# Altium PCB PCB_1.PcbDoc
Units mil, origin at the board's own origin, x right, y up, seen from the top; angles counter-clockwise.
Board outline 6655 x 4265 mil, 2 copper layers (Top Layer, Bottom Layer); 57 components, 68 nets, 281 pads, 9 vias.
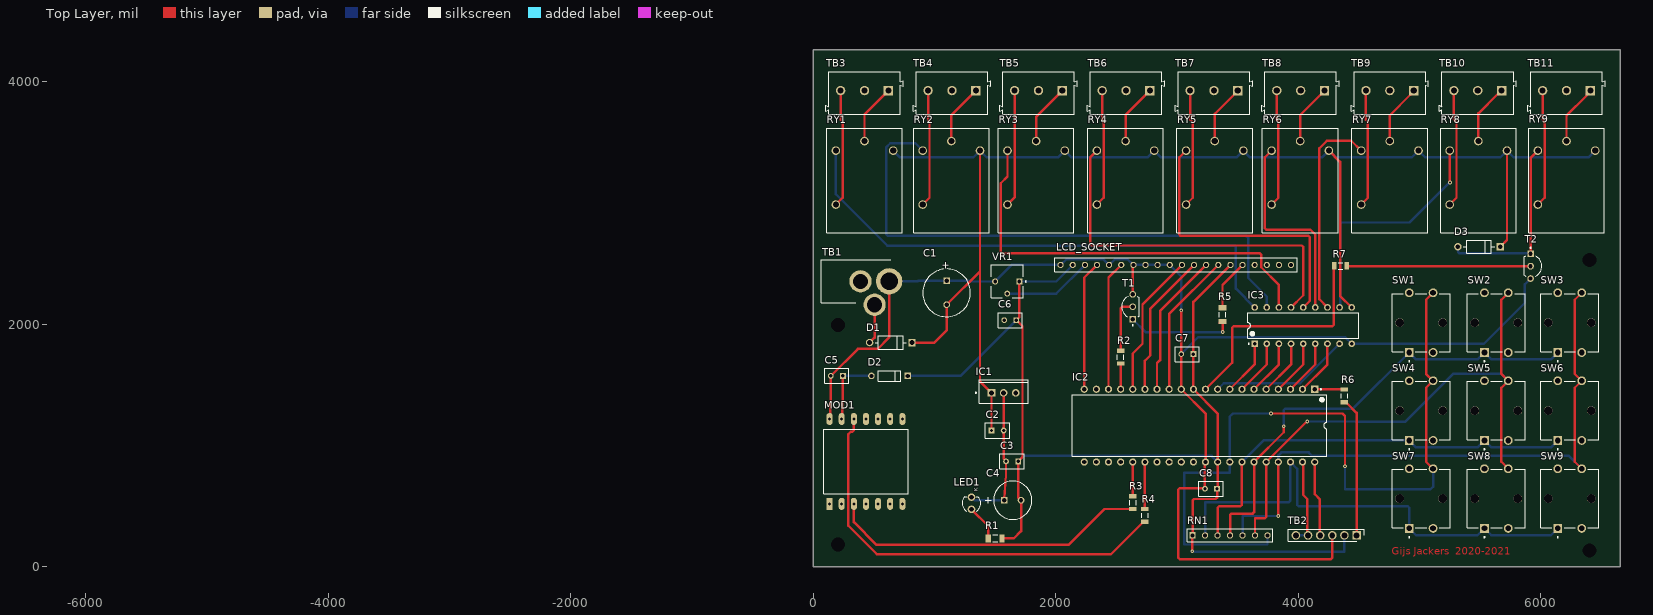
[diagram p0: Top Layer view]
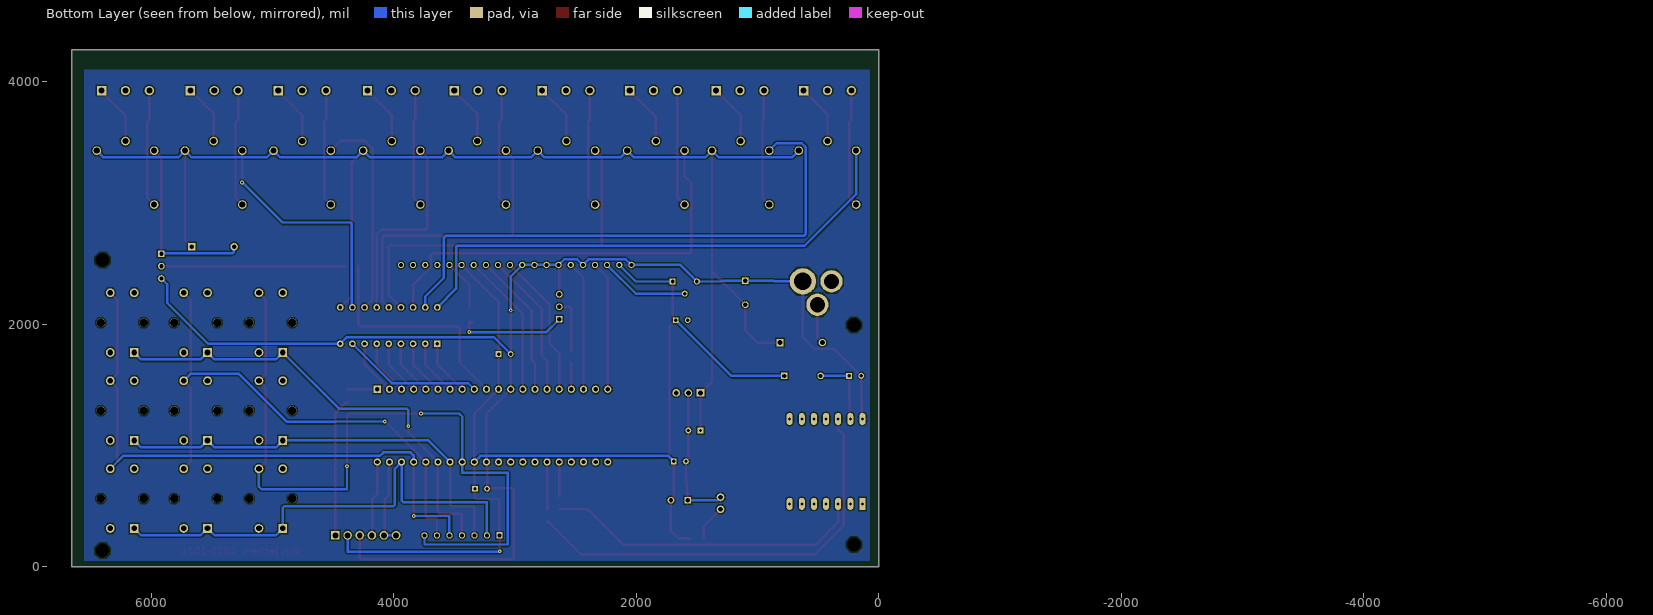
[diagram p1: Bottom Layer view, seen from below]
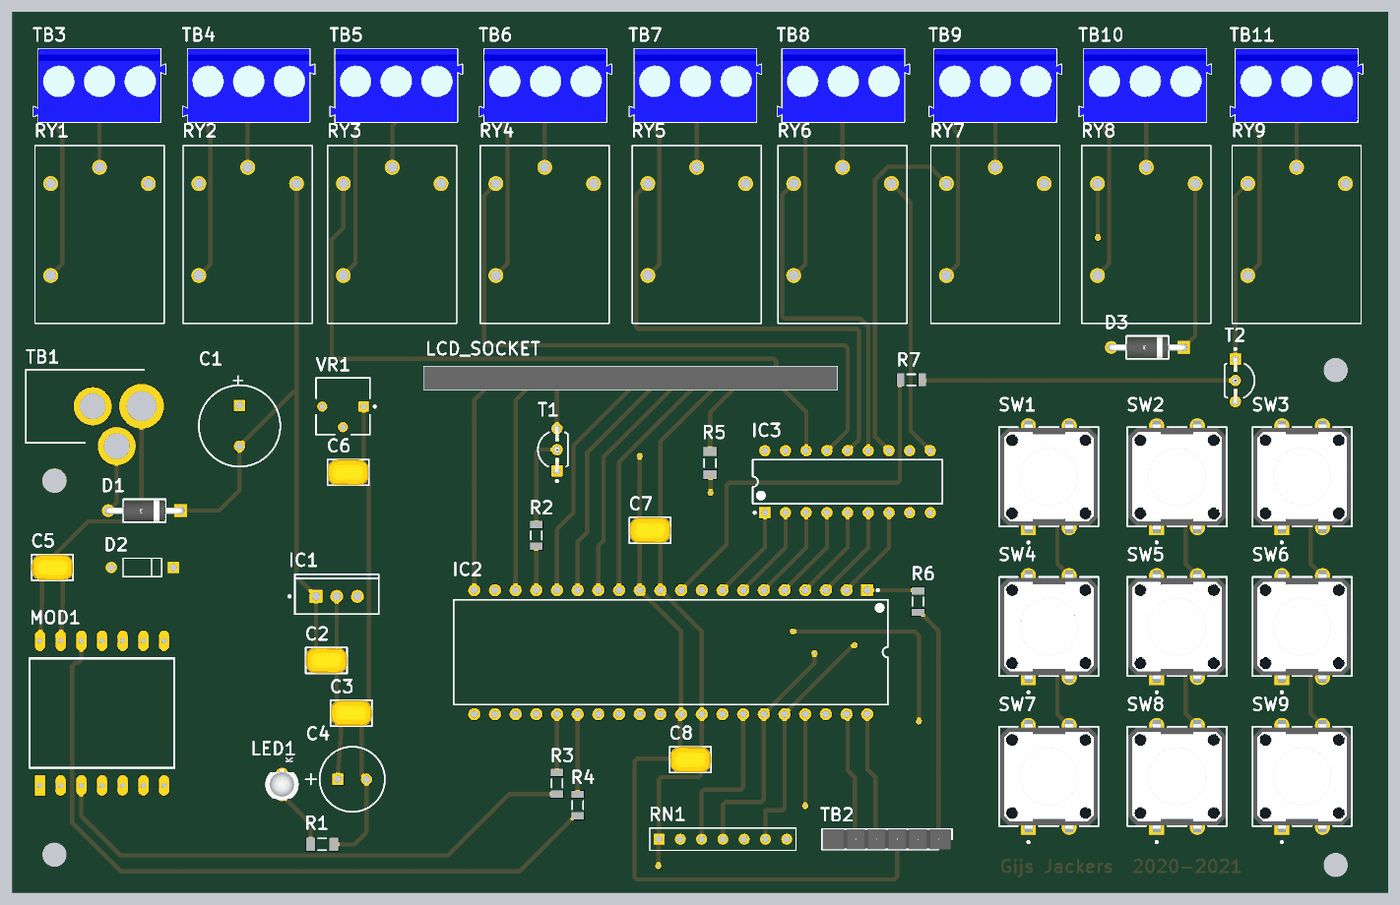
[diagram p2: 3D render of the assembled board from above, using the file's embedded part models]

## Layer stack, top to bottom
Top Solder: solder mask 0.4, Solder Resist, Dk 3.5
Top Layer: signal copper 1.4
Dielectric 1: dielectric 12.6, FR-4, Dk 4.8
Bottom Layer: signal copper 1.4
Bottom Solder: solder mask 0.4, Solder Resist, Dk 3.5

## Board outline
0,4265 6655,4265 6655,0 0,0

## Design rules (kind name [scope] priority, off if disabled: settings)
Clearance [All] p1: gap=10 ignorepadtopadclearanceinfootprint=FALSE except(0: Arc-Hole Track-Hole SMDPad-Hole THPad-Hole Via-Hole Fill-Hole Poly-Hole Region-Hole Text-Hole)
PolygonConnect [All] p1: connectstyle=Relief reliefconductorwidth=10 reliefentries=4 polygonreliefangle="90 Angle" airgapwidth=10
RoutingVias [All] p1: holewidth=15 width=30 viastyle="Through Hole" minholewidth=15 minwidth=30 maxholewidth=15 maxwidth=30
SolderMaskExpansion [All] p1: expansion=4 istentingtop=FALSE
Width [All] p1: maxlimit=20 minlimit=20 preferedwidth=20 minimp=50.000000 maximp=50.000000 favimp=50.000000
30 further rules are at their usual default settings.

## Components (designator, comment, footprint, x,y, rotation, side; value= is the part's Value field where it differs from the comment)
C1 "ECA-1HM221" CAPPR65-500-1250X1000X1350 1100,2260 r270 top
C2 "SR205C104KAR" FP-SR20-MFG 1520,1125 r0 top value=100nF
C3 "SR205C104KAR" FP-SR20-MFG 1640,870 r180 top value=100nF
C4 "ECA1HM101" CAPPR65-350-1150X800X1250 1645,550 r0 top
C5 "SR205C104KAR" FP-SR20-MFG 195,1575 r180 top value=100nF
C6 "SR205C104KAR" FP-SR20-MFG 1625,2035 r180 top value=100nF
C7 "SR205C104KAR" FP-SR20-MFG 3085,1755 r180 top value=100nF
C8 "SR205C104KAR" FP-SR20-MFG 3280,645 r180 top value=100nF
D1 "1N4007" FP-1N4007-MFG 640,1850 r180 top value=15pF
D2 "BAT43" DO-35_STM 780,1575 r180 top
D3 "1N4007" FP-1N4007-MFG 5490,2640 r180 top value=15pF
IC1 "MC7805CTG" ONSC-TO-220-3-221AB-01 1570,1435 r90 top
IC2 "PIC18F45K22-E/P" MCHP-PDIP-P40 3185,1165 r270 top
IC3 "ULN2803A" STM-DIP-18 4040,1990 r90 top
LCD_SOCKET "D01-9972042" D019972042 2040,2490 r0 top
LED1 "151031SS04000" "Type 3mm" 1305,525 r90 top
MOD1 "ESQ-107-12-G-D" DIP14 135,520 r90 top
R1 "ERJ-8GEYJ331V" RESC3216X70X50NL05T20 1500,235 r0 top
R2 "ERJ-8GEYJ472V" RESC3216X70X50LL05T20 2535,1730 r270 top
R3 "ERJ-8GEYJ102V" RESC3216X70X50LL05T20 2635,530 r90 top
R4 "ERJ-8GEYJ102V" RESC3216X70X50LL05T20 2735,425 r90 top
R5 "ERJ-8GEYJ4R7V" RESC3216X70X50NL05T20 3375,2080 r90 top
R6 "ERJ-8GEYJ100V" RESC3216X70X50LL05T20 4380,1410 r270 top
R7 "ERJ-8GEYJ472V" RESC3216X70X50LL05T20 4347.83,2482.83 r0 top
RN1 "4607X-101-103LF" BO_4607X 3128,260 r0 top
RY1 "G5LE-1A-CF DC12" "RELAY_G5LE-1A DC5_OMR" 423.11,2861.77 r0 top
RY2 "G5LE-1A-CF DC12" "RELAY_G5LE-1A DC5_OMR" 1139.33,2861.77 r0 top
RY3 "G5LE-1A-CF DC12" "RELAY_G5LE-1A DC5_OMR" 1838.11,2861.77 r0 top
RY4 "G5LE-1A-CF DC12" "RELAY_G5LE-1A DC5_OMR" 2575.55,2861.77 r0 top
RY5 "G5LE-1A-CF DC12" "RELAY_G5LE-1A DC5_OMR" 3310.55,2861.77 r0 top
RY6 "G5LE-1A-CF DC12" "RELAY_G5LE-1A DC5_OMR" 4015.55,2861.77 r0 top
RY7 "G5LE-1A-CF DC12" "RELAY_G5LE-1A DC5_OMR" 4754.33,2861.77 r0 top
RY8 "G5LE-1A-CF DC12" "RELAY_G5LE-1A DC5_OMR" 5484.33,2861.77 r0 top
RY9 "G5LE-1A-CF DC12" "RELAY_G5LE-1A DC5_OMR" 6211.17,2861.77 r0 top
SW1 "B3F-4000" FP-B3F-4000-MFG 5012.76,2013.94 r90 top
SW2 "B3F-4000" FP-B3F-4000-MFG 5632.76,2013.94 r90 top
SW3 "B3F-4000" FP-B3F-4000-MFG 6237.83,2013.94 r90 top
SW4 "B3F-4000" FP-B3F-4000-MFG 5012.76,1288.94 r90 top
SW5 "B3F-4000" FP-B3F-4000-MFG 5632.76,1288.94 r90 top
SW6 "B3F-4000" FP-B3F-4000-MFG 6237.83,1288.94 r90 top
SW7 "B3F-4000" FP-B3F-4000-MFG 5012.76,563.94 r90 top
SW8 "B3F-4000" FP-B3F-4000-MFG 5632.76,563.94 r90 top
SW9 "B3F-4000" FP-B3F-4000-MFG 6237.83,563.94 r90 top
T1 "BC337-25ZL1G" ONSC-TO-92-3-29-11_AM_BL 2635,2145 r90 top
T2 "BC337-25ZL1G" ONSC-TO-92-3-29-11_AM_BL 5915,2480 r270 top
TB1 "Component_1" MJ-180PH 638.03,2355 r180 top
TB2 "M20-7820646" HDRV6W70P0X254_1X6_1564X250X865P 4480,260 r180 top
TB3 "691101710003" 691101710003 423.11,3907.64 r180 top
TB4 "691101710003" 691101710003 1144.33,3907.64 r180 top
TB5 "691101710003" 691101710003 1857.47,3907.64 r180 top
TB6 "691101710003" 691101710003 2579.33,3907.64 r180 top
TB7 "691101710003" 691101710003 3304.32,3907.64 r180 top
TB8 "691101710003" 691101710003 4019.33,3907.64 r180 top
TB9 "691101710003" 691101710003 4754.32,3907.64 r180 top
TB10 "691101710003" 691101710003 5479.32,3907.64 r180 top
TB11 "691101710003" 691101710003 6211.17,3907.64 r180 top
VR1 "3362P-1-103LF" BOUR-3362P 1600,2355 r180 top

## Footprints (in the part's own frame and the unit in brackets; to place one, negate y for a bottom-side part, rotate by r counter-clockwise, add the part's x,y. Pads: shape width x height; smd on the part's side, far side on the other; paste and mask are expansions set on the pad)
691101710003 [mm] "5,00mm - modular - blue - Horizontal entry with pressure clamp - 12,6mm height - 03p"
  rect 1.95x1.95 hole 1.3: 1(-5,-0.5)
  round 1.95 hole 1.3: 2(0,-0.5) 3(5,-0.5)
  silkscreen extent -8.1,-4.5 8.1,4.5, body extent -8.1,-4.5 8.1,4.5, height 12.65
BO_4607X [mil]
  rect 52x52 hole 32 mask+0: 1(0,0)
  round 52 hole 32 mask+0: 2(103,0) 3(206,0) 4(309,0) 5(412,0) 6(515,0) 7(618,0)
  silkscreen extent -45,-54 663,54, body extent 0,0 10,10, height 10
BOUR-3362P [mm] "THD, 3-Leads, Body 6.6x6.99mm, Pitch 2.54mm"
  rect 1.25x1.25 hole 0.75: 1(-2.54,0.035)
  round 1.25 hole 0.75: 2(0,2.575) 3(2.54,0.035)
  silkscreen extent -4.03,-3.49 3.3,3.49, body extent -3.3,-3.49 3.3,3.49, height 4.95
CAPPR65-350-1150X800X1250 [mm] "THD, 2-Leads, Dia 8mm, Body 11.5mm"
  rect 1.4x1.4 hole 0.9: 1(-1.75,0)
  round 1.4 hole 0.9: 2(1.75,0)
  silkscreen extent -5.71,-4 4,4, body extent -4,-4 4,4, height 12.5
CAPPR65-500-1250X1000X1350 [mm] "THD, 2-Leads, Dia 10mm, Body Length 12.5mm"
  rect 1.4x1.4 hole 0.9: 1(-2.5,0)
  round 1.4 hole 0.9: 2(2.5,0)
  silkscreen extent -5,-5 5,5, body extent -5,-5 5,5, height 13.5
D019972042 [mm]
  round 1.3 hole 0.8: 1(0,0) 2(2.54,0) 3(5.08,0) 4(7.62,0) 5(10.16,0) 6(12.7,0) 7(15.24,0) 8(17.78,0) 9(20.32,0) 10(22.86,0) 11(25.4,0) 12(27.94,0) 13(30.48,0) 14(33.02,0) 15(35.56,0) 16(38.1,0) 17(40.64,0) 18(43.18,0) 19(45.72,0) 20(48.26,0)
  silkscreen extent -1.27,-1.4 49.53,1.5, body extent -1.27,-1.4 49.53,1.4, height 4.35
DIP14 [mil]
  rect 100x50 hole 25: 1(0,0)
  oval 100x50 hole 25: 2(0,-100) 3(0,-200) 4(0,-300) 5(0,-400) 6(0,-500) 7(0,-600) 8(700,-600) 9(700,-500) 10(700,-400) 11(700,-300) 12(700,-200) 13(700,-100) 14(700,0)
  silkscreen extent 85,-650 615,50
DO-35_STM [mil]
  rect 54x54 hole 34 mask+0: 1(0,0)
  round 54 hole 34 mask+0: 2(300,0)
  silkscreen extent 56,-44 244,45, body extent 0,0 10,10, height 10
FP-1N4007-MFG [mm]
  rect 1.55x1.55 hole 1 paste-1000 mask+0: 1(-4.44,0)
  round 1.55 hole 1 paste-1000 mask+0: 2(4.44,0)
  silkscreen extent -3.27,-1.4 3.27,1.4, body extent -5.32,-1.5 5.32,1.5, height 0.25
FP-B3F-4000-MFG [mm]
  rect 1.85x1.85 hole 1.2 paste-1000 mask+0: 1(-6.25,2.5)
  round 1.85 hole 1.2 paste-1000 mask+0: 2(6.25,2.5) 3(-6.25,-2.5) 4(6.25,-2.5)
  round 1.8 hole 1.8 unplated paste-1000 mask+0: ""(0,4.5) ""(0,-4.5)
  silkscreen extent -8.2,-6.1 6.1,6.1, body extent -7.27,-6.2 7.27,6.2, height 0.25
FP-SR20-MFG [mm]
  rect 1.2x1.2 hole 0.7 paste-1000 mask+0: 1(-1.27,0)
  round 1.2 hole 0.7 paste-1000 mask+0: 2(1.27,0)
  silkscreen extent -2.54,-1.59 2.54,1.59, body extent -2.64,-1.69 2.64,1.69, height 0.25
HDRV6W70P0X254_1X6_1564X250X865P [mm]
  rect 1.8x1.8 hole 1.2: 1(0,0)
  round 1.8 hole 1.2: 2(2.54,0) 3(5.08,0) 4(7.62,0) 5(10.16,0) 6(12.7,0)
  silkscreen extent -1.65,-1.25 14.35,1.25, body extent -1.47,-1.25 14.17,1.25, height 8.65
MCHP-PDIP-P40 [mm] "PDIP, 40-Leads, Body 51.75x13.53mm, Pitch 2.54mm"
  rect 1.5x1.5 hole 0.9: 1(-7.62,24.13)
  round 1.5 hole 0.9: 2(-7.62,21.59) 3(-7.62,19.05) 4(-7.62,16.51) 5(-7.62,13.97) 6(-7.62,11.43) 7(-7.62,8.89) 8(-7.62,6.35) 9(-7.62,3.81) 10(-7.62,1.27) 11(-7.62,-1.27) 12(-7.62,-3.81) 13(-7.62,-6.35) 14(-7.62,-8.89) 15(-7.62,-11.43) 16(-7.62,-13.97) 17(-7.62,-16.51) 18(-7.62,-19.05) 19(-7.62,-21.59) 20(-7.62,-24.13) 21(7.62,-24.13) 22(7.62,-21.59) 23(7.62,-19.05) 24(7.62,-16.51) 25(7.62,-13.97) 26(7.62,-11.43) 27(7.62,-8.89) 28(7.62,-6.35) 29(7.62,-3.81) 30(7.62,-1.27) 31(7.62,1.27) 32(7.62,3.81) 33(7.62,6.35) 34(7.62,8.89) 35(7.62,11.43) 36(7.62,13.97) 37(7.62,16.51) 38(7.62,19.05) 39(7.62,21.59) 40(7.62,24.13)
  silkscreen extent -7.74,-26.65 6.45,26.65, body extent -7.76,-26.6 7.76,26.6, height 6.35
MJ-180PH [mm]
  round 5.5 hole 3.65: 1(0.3,0)
  round 4.67 hole 3.16: 2(6.3,0) 3(3.35,4.9)
  silkscreen extent 0,-4.5 14.5,4.5
ONSC-TO-92-3-29-11_AM_BL [mm] "TO, 3-Leads, Body Dia 4.7mm, Pitch 2.6mm"
  rect 1.4x1.4 hole 0.9: 1(-2.6,0)
  round 1.4 hole 0.9: 2(0,0) 3(2.6,0)
  silkscreen extent -3.97,-1.34 2.13,2.35, body extent -2.84,-1.34 2.84,2.35, height 5.33
ONSC-TO-220-3-221AB-01 [mm] "FM, 3-Leads, Body 10.3x4.85mm, Pitch 2.54mm"
  rect 1.6x1.6 hole 1: 1(0,2.54)
  round 1.6 hole 1: 2(0,0) 3(0,-2.54)
  silkscreen extent -2.19,-5.15 2.72,5.92, body extent -2.16,-5.15 2.69,5.15, height 19.68
"RELAY_G5LE-1A DC5_OMR" [mm]
  round 1.808 hole 1.3 mask+0: 1(0,16.5) 2(-6,14.5) 3(-6,3.2) 5(6,14.5)
  silkscreen extent -7.93,-2.68 7.93,19.18
RESC3216X70X50LL05T20 [mm] "Chip Resistor, 2-Leads, Body 3.20x1.60mm, IPC High Density"
  rect 0.9x1.55 smd: 1(-1.325,0) 2(1.325,0)
  silkscreen extent -0.5,-0.67 0.5,0.67, body extent -1.63,-0.82 1.62,0.82, height 0.7
RESC3216X70X50NL05T20 [mm] "Chip Resistor, 2-Leads, Body 3.20x1.60mm, IPC Medium Density"
  rect 1.1x1.65 smd: 1(-1.425,0) 2(1.425,0)
  silkscreen extent -0.5,-0.73 0.5,0.73, body extent -1.63,-0.82 1.62,0.82, height 0.7
STM-DIP-18 [mm] "DIP, 18-Leads, Body 23.25x7.1mm, Pitch 2.54mm"
  rect 1.4x1.4 hole 0.8: 1(-3.81,10.16)
  round 1.4 hole 0.8: 2(-3.81,7.62) 3(-3.81,5.08) 4(-3.81,2.54) 5(-3.81,0) 6(-3.81,-2.54) 7(-3.81,-5.08) 8(-3.81,-7.62) 9(-3.81,-10.16) 10(3.81,-10.16) 11(3.81,-7.62) 12(3.81,-5.08) 13(3.81,-2.54) 14(3.81,0) 15(3.81,2.54) 16(3.81,5.08) 17(3.81,7.62) 18(3.81,10.16)
  silkscreen extent -3.93,-11.65 2.7,11.65, body extent -3.93,-11.63 3.93,11.63, height 3.93
"Type 3mm" [mm] "THT, LED-3mm, 2pin- Body 4.15mm(max)"
  round 1.6 hole 1: 1(1.27,0) 2(-1.27,0)
  silkscreen extent -1.66,-1.95 1.4,1.95, body extent -1.93,-1.94 1.87,1.94, height 10.5

## Part data
C1: library part CMP-1665-00043-1, "Aluminum Electrolytic Capacitor, 220 uF, +/- 20%, 50 V, -40 to 85 degC, 2-Pin THD, RoHS, Bulk", Case\Package=SOIC, Max Operating Temperature="70 degC", Max Supply Voltage="5.5 V", Min Operating Temperature="0 degC", Min Supply Voltage="4.5 V", Nominal Supply Current="10 mA", Nominal Supply Voltage="5 V", Package Quantity=50, Channels=2, ComponentLink1Description="Manufacturer URL", ComponentLink1URL=http://www.panasonic.com/, ComponentLink2Description=Datasheet, ComponentLink2URL=http://industrial.panasonic.com/cdbs/www-data/pdf/RDF0000/DMF0000COL68.pdf, Data Rate="120 kbps", DatasheetVersion=Mar-16, Height="1.5 mm", Interface=RS-232, Length="10 mm", Mount="Surface Mount", PackageDescription="2-Pin Radial Lead, Dia 10 mm, Body Length 12.5 mm", PackageReference=CAPPR65-500-1250X1000X1350, Packaging=Rail/Tube, Pins=16, Propagation Delay="10 us", Radiation Hardening=No, REACH SVHC="No SVHC", RoHSCompliant=true, Width="4 mm"
C2 C3 C5 C6 C7 C8: library part CMP-04427-000013-1, "CAP CER 0.1UF 50V X7R RADIAL", Capacitance=100nF, Manufacturer=AVX, Package=SR20, Temperature="-55°C to +125°C", Temperature Characteristic=X7R, Temperature Range High=+125°C, Temperature Range Low=-55°C, Tolerance=10%, Voltage=50V, Automotive=No, Category=Cap, ComponentLink2Description=Datasheet, ComponentLink2URL=http://datasheets.avx.com/SR-Series.pdf, Device Class L1="Passive Components", Device Class L2=Capacitors, Device Class L3="Ceramic Capacitors", Digikey Description="CAP CER 0.1UF 50V X7R RADIAL", Height=5.08mm, Lead Free=Yes, Manufacturer Part Number=SR205C104KAR, Material=Ceramic, Mouser Description="Multilayer Ceramic Capacitors MLCC - Leaded 50volts 0.1uF 10% X7R", Octopart=https://octopart.com/sr205c104kar-avx-145048, RoHS=TRUE, Voltage Rating=50V
C4: library part CMP-1665-00042-2, "Aluminum Electrolytic Capacitor, 100 uF, +/- 20%, 50 V, -40 to 85 degC, 2-Pin THD, RoHS, Bulk", Capacitance=100uF, Case/Package=Radial, Dielectric Material=Aluminium, Leakage Current=3uA, Manufacturer=Panasonic, Max Operating Temperature=85degC, Min Operating Temperature=-40degC, Package Description="2-Pin Radial Lead, Dia 8 mm, Height 12.5 mm", Package Quantity=200, Package Reference=CAPPR65-350-1150X800X1250, Ripple Current=250mA, Tolerance=20%, Voltage=50V, Datasheet URL=https://industrial.panasonic.com/cdbs/www-data/pdf/RDF0000/ABA0000C1218.pdf, Datasheet Version="Rev. 05, 10/2016", Diameter=8mm, Dissipation Factor=0.12%, Height=11.5mm, Height - Seated (Max)=0.492inch, Lead Diameter=0.6mm, Lead Free=LeadFree, Lead Pitch=3.5mm, Lead/Base Style=Straight, Length=11.5mm, Life (Hours)=2000Hour, Manufacturer URL=http://www.panasonic.com/, Mount=ThroughHole, Number of Pins=2, Packaging=Bulk, Polarity=Polar, Radiation Hardening=No, REACH SVHC=NoSVHC, Ripple Current (AC)=250mA, RoHSCompliant=true, Termination=Radial, Voltage Rating=50V, Voltage Rating (DC)=50V
D1 D3: library part CMP-123542-000001-1, "Rectifier diode 1000 V 1 A DO-41, ,", Capacitance=15pF, Forward Current=1A, Manufacturer=Diotec, Max Junction Temp=+175°C, Max Repetitive Reverse Voltage=1000V, Max Surge Forward Current=27A, Peak Reverse Current=5uA, Temperature="-50°C to +175°C", Temperature Range Low=-50°C, Automotive=No, Category=Diode, ComponentLink2Description=Datasheet, ComponentLink2URL=https://datasheet.octopart.com/1N4007-Diotec-datasheet-62346875.pdf, Device Class L1="Discrete Semiconductors", Device Class L2=Diodes, Device Class L3="Rectifier Diodes", Height=2.8mm, Ipc Land Pattern Name=DIOAD888W100L520D280, Lead Free=Yes, Manufacturer Part Number=1N4007, Octopart=https://octopart.com/1n4007-diotec-4040411, Package=1N4007, Reverse Voltage=1000V, RoHS=TRUE, Temperature Range High=+175°C
D2 RN1 RY1 RY2 RY3 RY4 RY5 RY6 RY7 RY8 RY9: "No Description Available", Copyright="Copyright (C) 2018 Accelerated Designs. All rights reserved", RefDes=RefDes, Type=DEV
  D2: Built_By=EMA_UL_Team, Manufacturer_Part_Number=BAT43, SourceLibrary=Add_to_database_2021-01-20, Vendor=STMicroelectronics
  RN1: Built_By=EMA_UL_Team, Manufacturer_Part_Number=4607X-101-103LF, SourceLibrary=BadPin1FPs_Fixed, Vendor="Bourns Electronics"
  RY1 RY2 RY3 RY4 RY5 RY6 RY7 RY8 RY9: Built_By=EMA_Justin, Manufacturer_Part_Number="G5LE-1A-CF DC12", SourceLibrary=Omron_2020-03-12, Vendor=Omron
IC1: library part CMP-2000-04928-1, "Positive Voltage Regulator, 1 A, 5 V, 0 to 125 degC, 3-Pin TO-220, RoHS, Tube", Current, Output, Maximum=1A, Current, Quiescent Supply=6.5mA, Current, Supply=3.2mA, Dropout Voltage=2V, Manufacturer="ON Semiconductor", Package Description="3-Pin Flange Mount, Vertical Straight Lead, Body 9.97 x 4.445 mm, Pitch 2.54 mm", Package Reference=TO-220-3-221AB-01, Package Type=TO-220, Package Version="Rev. A, 11/2010", Resistance, Thermal, Junction to Case=5degC/W, Temperature, Operating, Maximum=+125degC, Temperature, Operating, Minimum=0degC, Temperature, Operating, Range=0to+125degC, Voltage, Input Range=Maximumof35V, Voltage, Input, High Level=35V, Voltage, Noise=10μV/V, Voltage, Output=5V, Datasheet URL=http://www.onsemi.com/pub_link/Collateral/MC7800-D.PDF, Datasheet Version="Rev. 27, 11/2014", Dimensions=10.28x4.82x15.75mm, Dropout Voltage Measurement Current=1A, Height=15.75mm, Length=10.28mm, Line Regulation=20mV, Load Regulation=25mV, Manufacturer URL=http://www.onsemi.com/, Mounting Type=ThroughHole, Number of Outputs=1, Number of Pins=3, Output Type=Fixed, Polarity=Positive, Regulation, Line=0.5mV, Regulation, Load=1.3mV, Regulator Function=Standard, Regulator Type=PositiveVoltageOut, Type=VoltageRegulator, Voltage, Dropout=2V, Voltage, Supply=35V, Width=4.82mm
IC2: library part CMP-0116-01375-1, "Low-Power, High-Performance Microcontroller with XLP Technology, 64 MHz, 35 I/O, -40 to 125 degC, 40-pin PDIP (P40), Tube", Manufacturer=Microchip, Operation Voltage Range="2.3V - 5.5V", # of A/D Channels=28, ComponentLink1Description=Datasheet, ComponentLink1URL=http://ww1.microchip.com/downloads/en/DeviceDoc/41412F.pdf, ComponentLink2Description="Package Specification", ComponentLink2URL=http://www.microchip.com/stellent/groups/techpub_sg/documents/packagingspec/en012702.pdf, ComponentLink3Description="URL Link1", ComponentLink3URL="Product URL:http://www.microchip.com/datasheet/PIC18F45K22", DatasheetVersion="Rev. F", Digital Communication="2 -A/E/USART, 2 -MSSP(SPI/I2C)", EEPROM Data Memory (bytes)=256, I/O Pins=35, Internal Oscillator="16 MHz, 31 kHz", Max. CPU Speed MHz=64, Memory Type=Flash, Mounting Technology="Through Hole", PackageDescription="40-Lead Plastic Dual In-Line Package, Body 51.75 x 13.53 mm, Pitch 2.54 mm", PackageReference=PDIP-P40, PackageVersion="C04-016B, 04/2013", Packing=TUBE, PartNumber=PIC18F45K22-E/P, Program Memory KBytes=32, Program Memory KWords=16, RAM=1536, RoHS=TRUE, Timers="3 - 8-bit, 4 - 16-bit"
IC3: library part CMP-2000-05363-1, "Eight Darlington Arrays, 50 V, 2.25 W, 500 mA, 18-Pin DIP, RoHS, Tube", Collector Emitter Voltage V(br)ceo=50V, DC Collector Current=500mA, DC Current Gain hFE=1000hFE, Manufacturer=STMicroelectronics, Operating Temperature Max=85degC, Package Description="18-Pin Double In-line Package, Body 24.8 x 7.1 mm, Pitch 2.54 mm", Package Reference=DIP-18, Power Dissipation Pd=2.25W, Transistor Case Style=DIP, Automotive Qualification Standard=-, Datasheet URL=https://datasheet.ciiva.com/29306/171824-da-01-en-ic-uln2803-dil18-29306026.pdf, Datasheet Version=Sep-03, Manufacturer URL=http://www.st.com/, MSL=-, No. of Pins=18Pins, Product Range=-, SVHC=NoSVHC(17-Dec-2015), Transistor Polarity=NPN
LCD_SOCKET: "Connector", Manufacturer_Name=Harwin, Mouser2 Part Number=855-D01-9972042, Datasheet Link=https://componentsearchengine.com//D01-9972042.pdf, Height=4.25mm, Manufacturer_Part_Number=D01-9972042, Mouser2 Price/Stock=https://www.mouser.com/Search/Refine.aspx?Keyword=855-D01-9972042
LED1: library part CMP-1488-00005-1, "THT LED round mono-color color lens, WL-TMRW, Super Red", Emitting color="Super Red", Manufacturer="Wuerth Elektronik", ComponentLink1Description="Manufacturer URL", ComponentLink1URL=http://www.we-online.com, ComponentLink2Description=Datasheet, ComponentLink2URL=http://katalog.we-online.de/pbs/datasheet/7448042001.pdfhttp://katalog.we-online.de/pbs/datasheet/7448042001.pdfhttp://katalog.we-online.de/pbs/datasheet/7448042001.pdfhttp://katalog.we-online.de/pbs/datasheet/151031SS04000.pdf, PackageReference="Type 3mm", PartNumber=151031SS04000
MOD1: library part CMP-1026-00022-1, "PC/104(TM) Elevated Socket Strip, Through-hole, Vertical, -55 to 125 degC, 2.54 mm Pitch, 14-Pin, Female, RoHS", Manufacturer=Samtec, Temperature Range="-55 to 125 degC", ComponentLink1Description="Manufacturer URL", ComponentLink1URL=http://www.samtec.com, ComponentLink2Description=Datasheet, ComponentLink2URL=http://www.samtec.com/documents/webfiles/pdf/ESQ_TH.PDF, ComponentLink3Description="Package Specification", ComponentLink3URL=http://www.samtec.com/documents/webfiles/cpdf/ESQ-1XX-XX-X-X-XXX-XX-X-XX-MKT.pdf, DatasheetVersion=F-214, Manufacturer Part Number=ESQ-107-12-G-D, Mounting Technology=Through-hole, Orientation=Vertical, PackageDescription="ESQ Strip ASM", PackageReference=ESQ-107-12-X-D, PackageVersion="BZ, 9/1998", PartNumber=ESQ-107-12-G-D, Pitch="2.54 mm", RoHS=True
R1: library part CMP-2003-00612-1, Manufacturer=Panasonic, Part Number=ERJ-8GEYJ331V
R2 R7: library part CMP-2003-00636-1, Manufacturer=Panasonic, Part Number=ERJ-8GEYJ472V
R3 R4: library part CMP-2003-00544-1, Manufacturer=Panasonic, Part Number=ERJ-8GEYJ102V
R5: library part CMP-1014-00018-2, Manufacturer=Panasonic, Part Number=ERJ-8GEYJ4R7V
R6: library part CMP-2003-00542-1, Manufacturer=Panasonic, Part Number=ERJ-8GEYJ100V
SW1 SW2 SW3 SW4 SW5 SW6 SW7 SW8 SW9: library part CMP-08834-000001-1, "SWITCH TACTILE SPST-NO 0.05A 24V", Ambient Temperature Range High=+70°C, Ambient Temperature Range Low=-25°C, Contact Current Rating=50mA, Contact Resistance=100mΩ, Manufacturer=Omron, Operating Force=1.27N, Temperature="-25°C to +70°C", Voltage Rating Dc=24V, Automotive=No, Category=Switch, ComponentLink2Description=Datasheet, ComponentLink2URL=https://omronfs.omron.com/en_US/ecb/products/pdf/en-b3f.pdf, Device Class L1=Electromechanical, Device Class L2=Switches, Device Class L3="Tactile Switches", Digikey Description="SWITCH TACTILE SPST-NO 0.05A 24V", Electromechanical Life=3000000Cycles, Height=4.5mm, Lead Free=Yes, Manufacturer Part Number=B3F-4000, Mount="Through Hole", Mouser Description="Tactile Switches 12x12mm Std Ht 4.3 Gen Purpose 130g", Octopart=https://octopart.com/b3f-4000-omron-22510, Package=B3F-4000, RoHS=TRUE, Temperature Range High=+70°C, Temperature Range Low=-25°C, Throw Configuration=SPST-NO
T1 T2: library part CMP-1048-01574-1, "Amplifier Transistor, NPN Silicon, 3-Pin TO-92, Pb-Free, Ammo Box", Manufacturer="On Semiconductor", ComponentLink1Description="Manufacturer URL", ComponentLink1URL=http://www.onsemi.com/, ComponentLink2Description=Datasheet, ComponentLink2URL=http://www.onsemi.com/pub_link/Collateral/BC337-D.PDF, ComponentLink3Description="Package Specification", ComponentLink3URL=http://www.onsemi.com/pub_link/Collateral/MAC97-D.PDF, DatasheetVersion="Rev. 8", IC Continuous (A)=0.8, Mounting Technology="Through Hole", PackageDescription="3-Pin Transistor Outline, Body 4.825 x 3.685 mm, Pitch 1.27 mm", PackageReference=TO-92-3-29-11_AM_BL, PackageVersion="Rev. AM", Packing="Ammo Box", PartNumber=BC337-25ZL1G, Polarity=NPN, RoHS=TRUE
TB2: "Connector", Manufacturer_Name=Harwin, Mouser2 Part Number=855-M20-7820646, Datasheet Link=https://componentsearchengine.com//M20-7820646.pdf, Height=8.65mm, Manufacturer_Part_Number=M20-7820646, Mouser2 Price/Stock=https://www.mouser.com/Search/Refine.aspx?Keyword=855-M20-7820646
TB3 TB4 TB5 TB6 TB7 TB8 TB9 TB10 TB11: library part CMP-1502-03257-1, "Series 101 - 5.00 mm Horizontal Entry Modular with Pressure Clamp WR-TBL, 3 pin", Manufacturer="Wurth Elektronik", Operating Temperature=-40to105degC, Datasheet URL=http://katalog.we-online.de/em/datasheet/6911017100xx.pdf, Manufacturer URL=http://www.we-online.de, Mounting Technology=THT, Package Reference=691101710003, Packaging=Box, Part Number=691101710003, Pin Number=3, Pitch=5.00mm, Publisher=WurthElektronik
VR1: library part CMP-1747-00004-1, "Square Trimpot(R) Trimming Potentiometer, 10 KOhm, 300 V, -55 to 125 degC, 3-Pin THD, RoHS, Tube", Case Code (Imperial)=0612, Case Code (Metric)=1632, Case/Package=1206, Manufacturer=Bourns, Max Operating Temperature=125degC, Min Operating Temperature=-25degC, Package Quantity=5000, Power Rating="1 W", Resistance="50 mohm", Tolerance=1%, Voltage Rating="220 mV", ComponentLink1Description="Manufacturer URL", ComponentLink1URL=http://www.bourns.com/, ComponentLink2Description=Datasheet, ComponentLink2URL=http://www.bourns.com/docs/Product-Datasheets/3362.pdf, DatasheetVersion=May-16, Height="0.6 mm", Length="3.2 mm", Manufacturer Part Number=3362P-1-103LF, Mount="Surface Mount", PackageDescription="3-Pin Through Hole Device, Body 6.6 x 6.99 mm, Pitch 2.54 mm", PackageReference=3326P, Packaging="Tape and Reel", Pins=2, REACH SVHC="No SVHC", RoHSCompliant=True, Width="1.6 mm"

## Free pads (board coordinates)
  round 60 hole 118 unplated: 4(-6055,105) 4(-6010,130) 4(205,185) 5(6400,135) 6(6400,2530)
  round 60 hole 118: 7(205,1995)

## Via types
v1: diameter 30, hole 15, Top Layer to Bottom Layer, 9 vias

## Nets (pads, with @x,y where several pads share a name; then routed paths per layer and width w, separated by ;. In a path a pad name is that pad's centre, name@x,y a point inside that pad or via, vN(x,y) a via of type N, cw(c..) or ccw(c..) an arc to the next point about the centre after c; other vN are vias at no path point)
+5: C3.1 C4.2 C6.1 C7.1 C8.1 D2.1 IC2.11 IC2.32 LCD_SOCKET.2 LCD_SOCKET.15 R1.2 RN1.1 TB2.2 VR1.1 | length 9734.4
  Top Layer w20: R1.2 1653.9,235 1713.9,295 C4.2 1690,573.9 C3.1 1726,906 1726,1984 C6.1 1700,2060 VR1.1 ; v1(3125,130) 3125,260 RN1.1 3128,548.28 3139.72,560 3318.28,560 3330,571.72 C8.1 3335,645 IC2.32 3335,1265 IC2.11 C7.1 3135,2185 LCD_SOCKET.15
  Bottom Layer w20: D2.1 1215,1575 C6.1 ; C3.1 1735,915 3285,915 IC2.32 ; VR1.1 2003.62,2353.62 LCD_SOCKET.2 ; v1(3125,130) 3120,130 3120,125 4380,125 TB2.2
GND: C1.1 C2.2 C3.2 C4.1 C5.2 C6.2 C7.2 C8.2 IC1.2 IC2.12 IC2.31 IC3.9 LCD_SOCKET.1 LCD_SOCKET.5 LCD_SOCKET.7 LCD_SOCKET.8 LCD_SOCKET.9 LCD_SOCKET.10 LED1.1 MOD1.14 T1.3 T2.3 TB1.1 TB2.3 VR1.3 | length 12797.4
  Top Layer w20: MOD1.14 145,1408 C5.2 368,1798 532,1798 626.22,1892.22 TB1.1 ; IC1.2 C2.2 1570,895.34 1590,875.34 C3.2 1590,760 1574.13,561.38 1574.13,558.21 1574.68,555.9 C4.1 ; T1.3 2635,2485 LCD_SOCKET.7 ; v1(3035,2115) C7.2 IC2.12 3235,1265 IC2.31 3230,865 C8.2 3225,650 3021.72,650 3010,638.28 3010,76.72 3021.72,65 4268.28,65 4280,76.72 TB2.3
  Bottom Layer w20: TB1.1 861,2355 864.43,2358.43 C1.1 1297,2358.43 1301.8,2353.62 VR1.3 1636.38,2490 LCD_SOCKET.1 2086,2536 2394,2536 LCD_SOCKET.5 2486,2536 2594,2536 LCD_SOCKET.7 LCD_SOCKET.8 LCD_SOCKET.9 LCD_SOCKET.10 3035,2395 v1(3035,2115) ; LED1.1 1330,550 C4.1 ; C7.2 3175,1895 4385,1895 IC3.9 5530,1840 5867,2177 5867,2329.64 T2.3
NetC5_1: C5.1 D2.2 MOD1.13 | length 590.3
  Top Layer w20: MOD1.13 245,1408 C5.1
  Bottom Layer w20: C5.1 D2.2
NetD1_2: D1.2 TB1.3 | length 329
  Top Layer w20: D1.2 506.14,1890.95 TB1.3
NetD3_2: D3.2 RY9.2 T2.1 | length 1522.8
  Top Layer w20: T2.1 5915,3372.69 RY9.2
  Bottom Layer w20: D3.2 5317.49,2637.71 5317.49,2596.72 5329.2,2585 5912.36,2585 T2.1
NetIC3_11: IC3.11 RY8.2 | length 2004.1
  Top Layer w20: RY8.2 5250,3434.53 v1(5250,3170)
  Bottom Layer w20: IC3.11 4345,2145 4345,2828.28 4356.72,2840 4917.29,2840 5247.29,3170 v1(5250,3170)
NetIC3_12: IC3.12 RY7.2 | length 1745.1
  Top Layer w20: IC3.12 4172,2208 4172,3451 4235,3514 4436.75,3514 RY7.2
NetIC3_13: IC3.13 RY6.2 | length 1702.2
  Top Layer w20: RY6.2 3723,3376.31 3723,3082 3723.74,3081.26 3723.74,2791.72 3735.46,2780 4100,2780 4140,2740 IC3.13
NetIC3_14: IC3.14 RY5.2 | length 2402
  Top Layer w20: RY5.2 3018,3376.31 3018,2741.72 3029.72,2730 4083.28,2730 4095,2718.28 4095,2195 IC3.14
NetIC3_15: IC3.15 RY4.2 | length 3100.7
  Top Layer w20: RY4.2 2283,3376.31 2283,2661.72 2294.72,2650 4028.28,2650 4040,2638.28 4040,2240 IC3.15
NetIC3_16: IC3.16 RY3.2 | length 3510.4
  Top Layer w20: RY3.2 1601.89,3219.55 1546.3,3163.96 1546.3,2596.72 1558.02,2585 3555,2585 3555.07,2584.93 3639.93,2584.93 3640,2585 3682.69,2585 3694.41,2573.28 3694.41,2471.12 3840,2325.53 IC3.16
NetIC3_17: IC3.17 RY2.2 | length 4689.9
  Bottom Layer w20: RY2.2 842.75,3493 635,3493 603,3461 603,2741.72 614.72,2730 3570,2730 3585.59,2714.41 3585.59,2383.98 3740,2229.57 IC3.17
NetIC3_18: IC3.18 RY1.2 | length 4400
  Bottom Layer w20: RY1.2 186.89,3073.11 611,2649 3473.88,2649 3485.59,2637.28 3485.59,2294.41 IC3.18
NetLCD_SOCKET_3: LCD_SOCKET.3 VR1.2 | length 737.9
  Bottom Layer w20: VR1.2 2003.62,2253.62 LCD_SOCKET.3
NetLCD_SOCKET_16: LCD_SOCKET.16 R5.2 | length 422.2
  Top Layer w20: R5.2 3375,2325 LCD_SOCKET.16
NetLED1_2: LED1.2 R1.1 | length 297.5
  Top Layer w20: LED1.2 1443.9,336.1 R1.1
NetMOD1_3: MOD1.3 R3.1 | length 2650.4
  Top Layer w20: MOD1.3 335,370 523,182 2106,182 2401.83,477.83 R3.1
NetMOD1_12: MOD1.12 R4.1 | length 3559.7
  Top Layer w20: MOD1.12 335,1126.72 323.28,1115 310,1115 290,1095 290,340 525,105 2454.37,105 2722.2,372.83 R4.1
NetR2_1: R2.1 T1.2 | length 456
  Top Layer w20: R2.1 2535,2133.28 2546.72,2145 T1.2
NetR5_1: R5.1 T1.1 | length 902.1
  Top Layer w20: R5.1@3352.52,2012.24 3364.17,2023.9 R5.1 3377.5,2021.4 v1(3377.5,1936.56)
  Bottom Layer w20: T1.1 2741.08,1936.56 v1(3377.5,1936.56)
NetR6_2: R6.2 TB2.1 | length 1146.8
  Top Layer w20: R6.2 4392.8,1357.83 4400.51,1350.12 4400.51,1349.49 4480,1270 TB2.1
NetR7_2: R7.2 T2.2 | length 1517.8
  Top Layer w20: R7.2 4400,2480 T2.2
NetRY1_1: RY1.1 TB3.1 | length 497.5
  Top Layer w20: RY1.1 423.11,3730.46 TB3.1
NetRY1_3: RY1.3 TB3.3 | length 969.7
  Top Layer w20: RY1.3 243,3043.87 243,3671 226.27,3687.73 TB3.3
NetRY2_1: RY2.1 TB4.1 | length 499.6
  Top Layer w20: RY2.1 1139.33,3725.46 TB4.1
NetRY2_3: RY2.3 TB4.3 | length 967.5
  Top Layer w20: RY2.3 959,3043.65 959,3674 947.49,3685.51 TB4.3
NetRY3_1: RY3.1 TB5.1 | length 505.5
  Top Layer w20: RY3.1 1838.11,3711.1 TB5.1
NetRY3_3: RY3.3 TB5.3 | length 963.9
  Top Layer w20: RY3.3 1660.63,3046.5 TB5.3
NetRY4_1: RY4.1 TB6.1 | length 499.1
  Top Layer w20: RY4.1 2575.55,3726.69 TB6.1
NetRY4_3: RY4.3 TB6.3 | length 967.8
  Top Layer w20: RY4.3 2395,3043.43 2395,3673 2382.49,3685.51 TB6.3
NetRY5_1: RY5.1 TB7.1 | length 494.9
  Top Layer w20: RY5.1 3310.55,3735.55 3472.79,3897.79 3472.79,3898.94 TB7.1
NetRY5_3: RY5.3 TB7.3 | length 972
  Top Layer w20: RY5.3 3130,3043.43 3130,3668 3107.48,3690.52 TB7.3
NetRY6_1: RY6.1 TB8.1 | length 499.1
  Top Layer w20: RY6.1 4015.55,3725.55 4187.8,3897.8 4187.8,3898.94 TB8.1
NetRY6_3: RY6.3 TB8.3 | length 967.8
  Top Layer w20: RY6.3 3835,3043.43 3835,3673 3822.49,3685.51 TB8.3
NetRY7_1: RY7.1 TB9.1 | length 497.5
  Top Layer w20: RY7.1 4754.33,3724.33 4922.79,3892.79 4922.79,3898.94 TB9.1
NetRY7_3: RY7.3 TB9.3 | length 969.6
  Top Layer w20: RY7.3 4574,3043.65 4574,3671 4557.48,3687.52 TB9.3
NetRY8_1: RY8.1 TB10.1 | length 497.7
  Top Layer w20: RY8.1 5484.33,3739.33 5643.94,3898.94 5647.79,3898.94 TB10.1
NetRY8_3: RY8.3 TB10.3 | length 971.6
  Top Layer w20: RY8.3 5304,3043.65 5304,3669 5282.48,3690.52 TB10.3
NetRY9_1: RY9.1 TB11.1 | length 497.5
  Top Layer w20: RY9.1 6211.17,3721.17 6379.64,3889.64 6379.64,3898.94 TB11.1
NetRY9_3: RY9.3 TB11.3 | length 969.7
  Top Layer w20: RY9.3 6031,3043.81 6031,3671 6014.33,3687.67 TB11.3
RA0: IC2.2 IC3.7 | length 459.9
  Top Layer w20: IC2.2 4240,1670 IC3.7
RA1: IC2.3 IC3.6 | length 459.9
  Top Layer w20: IC2.3 4140,1670 IC3.6
RA2: IC2.4 IC3.5 | length 459.9
  Top Layer w20: IC2.4 4040,1670 IC3.5
RA3: IC2.5 IC3.4 | length 459.9
  Top Layer w20: IC2.5 3940,1670 IC3.4
RA4: IC2.6 IC3.3 | length 459.9
  Top Layer w20: IC2.6 3840,1670 IC3.3
RA5: IC2.7 IC3.2 | length 459.9
  Top Layer w20: IC2.7 3740,1670 IC3.2
RA6: IC2.14 LCD_SOCKET.13 | length 1192.8
  Top Layer w20: IC2.14 2835,1680 2860,1705 2860,2110 LCD_SOCKET.13
RA7: IC2.13 LCD_SOCKET.14 | length 1192.8
  Top Layer w20: IC2.13 2935,2085 LCD_SOCKET.14
RB0: IC2.33 RN1.7 SW1.4 SW4.4 SW7.4 | length 6193.2
  Top Layer w20: v1(3775,1265) 4365,1265 4385,1245 v1(4385,830) ; SW7.4 5054,867.18 5054,1477.82 SW4.4 5054,1592.18 5054,2202.82 SW1.4
  Bottom Layer w20: RN1.7 3746,185 3060,185 3060,775 3435,775 IC2.33 3435,1240 3460,1265 v1(3775,1265) ; v1(4385,830) 4385,640 5090,640 5111.18,661.18 SW7.4
RB1: IC2.34 RN1.3 SW4.1 SW5.1 SW6.1 | length 3564.6
  Top Layer w20: RN1.3 3334,488.28 3345.72,500 3523.28,500 3535,511.72 IC2.34
  Bottom Layer w20: IC2.34 3712.87,1042.87 SW4.1 4971.2,986 5477.46,986 SW5.1 5591.2,986 6082.53,986 SW6.1
RB2: IC2.35 RN1.4 SW1.1 SW2.1 SW3.1 | length 3869.3
  Top Layer w20: RN1.4 3437,428.28 3448.72,440 3623.28,440 3635,451.72 IC2.35 3880,1110 v1(3880,1160)
  Bottom Layer w20: v1(3880,1160) 3880,1293.28 3891.72,1305 4451.46,1305 SW1.1 4971.2,1711 5477.46,1711 SW2.1 5591.2,1711 6082.53,1711 SW3.1
RB3: IC2.36 RN1.6 SW2.4 SW5.4 SW8.4 | length 4558.3
  Top Layer w20: RN1.6 3643,400 3723.28,400 3735,411.72 IC2.36 4067.13,1197.13 4072.13,1197.13 v1(4074.04,1199.04) ; SW8.4 5674,867.18 5674,1477.82 SW5.4 5674,1592.18 5674,2202.82 SW2.4
  Bottom Layer w20: v1(4074.04,1199.04) 4476.85,1199.04 4479.9,1196 4880,1196 5276,1592 5674.18,1592 SW5.4
RB4: IC2.37 RN1.5 SW3.4 SW6.4 SW9.4 | length 5066.7
  Top Layer w20: v1(3835,420) IC2.37 ; SW9.4 6279,867.26 6279,1477.74 SW6.4 6279,1592.26 6279,2202.74 SW3.4
  Bottom Layer w20: RN1.5 3540,420 v1(3835,420) ; IC2.37 3835,919.53 3860,944.53 4085,944.53 4114.53,915 6231.26,915 SW9.4
RB5: IC2.38 RN1.2 SW7.1 SW8.1 SW9.1 | length 4107
  Bottom Layer w20: RN1.2 3231,535 3923.28,535 3935,546.72 IC2.38@3935,855 ; IC2.38@3940,855 IC2.38@3935,855 ; SW9.1 6082.53,261 5591.2,261 SW8.1 5477.46,261 4971.2,261 SW7.1 4914.33,488.28 4902.61,500 4001.72,500 3990,511.72 3990,810 IC2.38 IC2.38@3935,855
RB6: IC2.39 TB2.5 TB2.6 | length 723.6
  Top Layer w20: IC2.39 4040,860 4040,593.28 4075,558.28 4075,265 TB2.5
  Bottom Layer w20: TB2.6 TB2.5
RB7: IC2.40 TB2.4 | length 623.6
  Top Layer w20: IC2.40 4135,600 4175,560 4175,265 TB2.4
RC0: IC2.15 LCD_SOCKET.12 | length 1192.8
  Top Layer w20: IC2.15 2735,1700 2780,1745 2780,2130 LCD_SOCKET.12
RC1: IC2.16 LCD_SOCKET.11 | length 1192.8
  Top Layer w20: IC2.16 2635,1760 2715,1840 2715,2165 LCD_SOCKET.11
RC2: IC2.17 R2.2 | length 212.8
  Top Layer w20: IC2.17 R2.2
RC3: IC2.18 LCD_SOCKET.6 | length 1068.5
  Top Layer w20: IC2.18 2435,2385 LCD_SOCKET.6
RC6: IC2.25 R3.2 | length 282.8
  Top Layer w20: R3.2 IC2.25
RC7: IC2.26 R4.2 | length 387.8
  Top Layer w20: R4.2 IC2.26
RD1: IC2.20 LCD_SOCKET.4 | length 1068.5
  Top Layer w20: IC2.20 2235,2385 LCD_SOCKET.4
RE0: IC2.8 IC3.1 | length 459.9
  Top Layer w20: IC2.8 3640,1670 IC3.1
RE1: IC2.9 IC3.8 | length 1160.3
  Bottom Layer w20: IC2.9 3385,1515 4015,1515 IC3.8
RE2: IC2.10 R7.1 | length 1934
  Top Layer w20: IC2.10 3455,1685 3455,1973.28 3466.72,1985 4280.72,1985 4292.44,1996.72 4292.44,2479.61 R7.1
RE3: IC2.1 R6.1 | length 246.2
  Top Layer w20: IC2.1 4377.17,1465 R6.1
VE: C1.2 C2.1 D1.1 D3.1 IC1.1 IC3.10 RY1.5 RY2.5 RY3.5 RY4.5 RY5.5 RY6.5 RY7.5 RY8.5 RY9.5 | length 11617.8
  Top Layer w20: D1.1 1000,1850 1100,1950 C1.2 1375.55,2437.13 ; RY2.5 1375.55,2437.13 ; C2.1 IC1.1 1375.55,1529.45 1375.55,2437.13 ; RY6.5 4345,3339.41 4345,2235 IC3.10 ; D3.1 5720.55,2695.75 RY8.5
  Bottom Layer w20: RY1.5 714.97,3377 1319.91,3377 RY2.5 1431.19,3377 2018.69,3377 RY3.5 2129.97,3377 2756.13,3377 RY4.5 2867.41,3377 3491.13,3377 RY5.5 3602.41,3377 4196.13,3377 RY6.5 4307.41,3377 4934.91,3377 RY7.5 5046.19,3377 5664.91,3377 RY8.5 5776.19,3377 6391.75,3377 RY9.5
pads on no net: IC1.3 IC2.19 IC2.21 IC2.22 IC2.23 IC2.24 IC2.27 IC2.28 IC2.29 IC2.30 LCD_SOCKET.17 LCD_SOCKET.18 LCD_SOCKET.19 LCD_SOCKET.20 MOD1.1 MOD1.2 MOD1.4 MOD1.5 MOD1.6 MOD1.7 MOD1.8 MOD1.9 MOD1.10 MOD1.11 SW1. SW1.2 SW1.3 SW2. SW2.2 SW2.3 SW3. SW3.2 SW3.3 SW4. SW4.2 SW4.3 SW5. SW5.2 SW5.3 SW6. SW6.2 SW6.3 SW7. SW7.2 SW7.3 SW8. SW8.2 SW8.3 SW9. SW9.2 SW9.3 TB1.2 TB3.2 TB4.2 TB5.2 TB6.2 TB7.2 TB8.2 TB9.2 TB10.2 TB11.2

## Polygon pours and split planes (outlines as drawn)
GND on Bottom Layer "GND_L02_P000" (solid, pour order 0): 75,4100 6550,4100 6550,50 75,50

## Other copper
Top Layer:
  text "Gijs Jackers  2020-2021" at 4770,99.99 h60

## Silkscreen, mask and mechanical layers (free items; w line width, h text height)
Boardoutline:
  lines w10: 25,25 25,4250 6635,4250 6635,25 25,25

## Text inside footprints (layer, text, board x,y; h text height)
C1: Top Overlay "+" at 1070,2520 h59.06 r270
LED1: Top Overlay "K" at 1355,625 h30 r90; Mechanical 15 "K" at 1355,625 h30 r90